# Altium PCB PCB1.PcbDoc
Units mm, origin at the board's own origin, x right, y up, seen from the top; angles counter-clockwise.
Board outline 88.9 x 93.98 mm, 2 copper layers (Top Layer, Bottom Layer); 19 components, 17 nets, 114 pads, 0 vias.
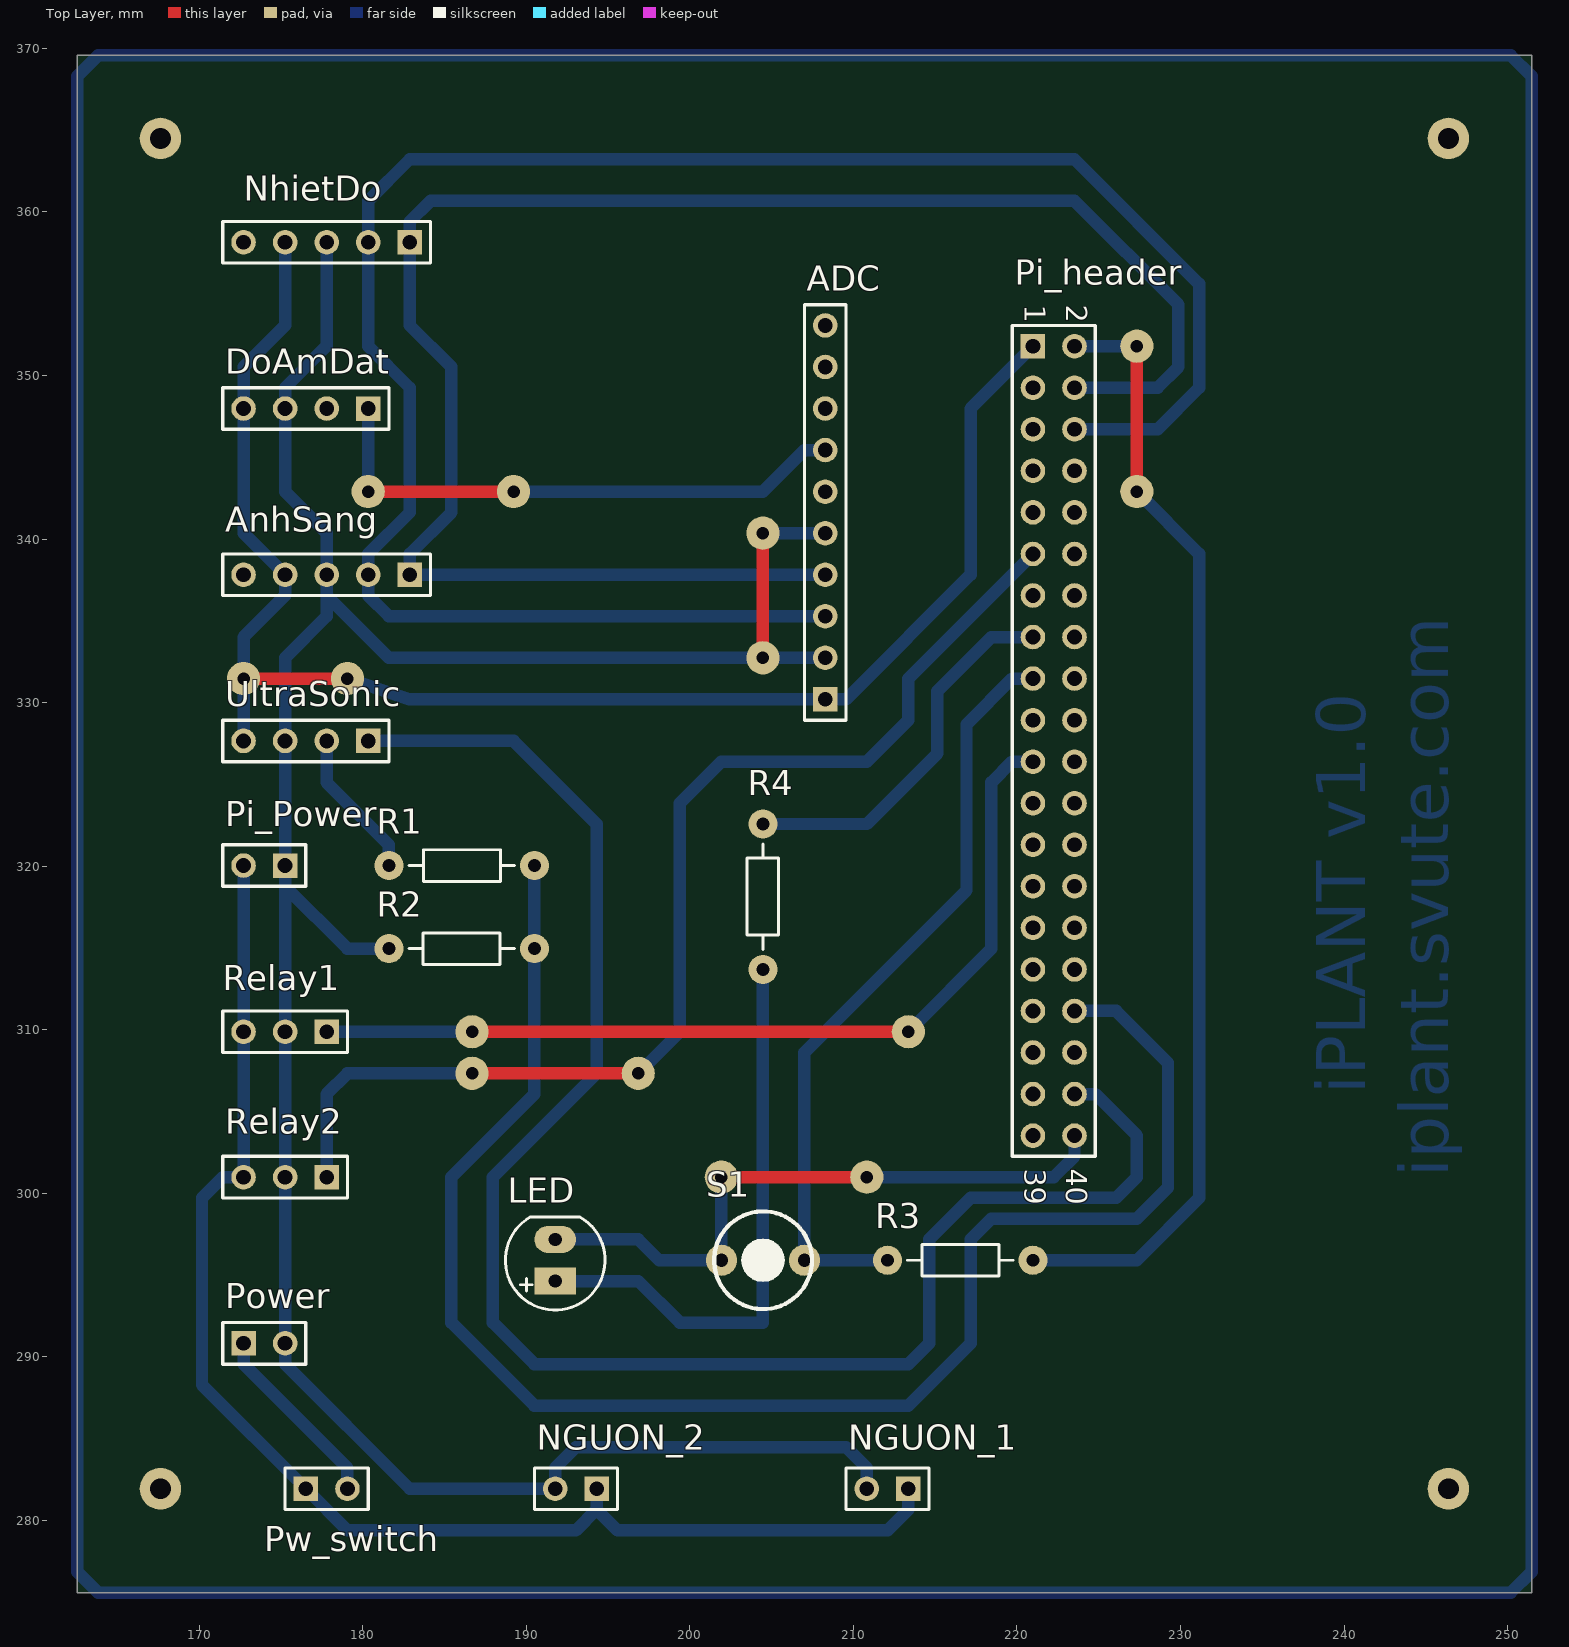
[diagram p0: Top Layer view]
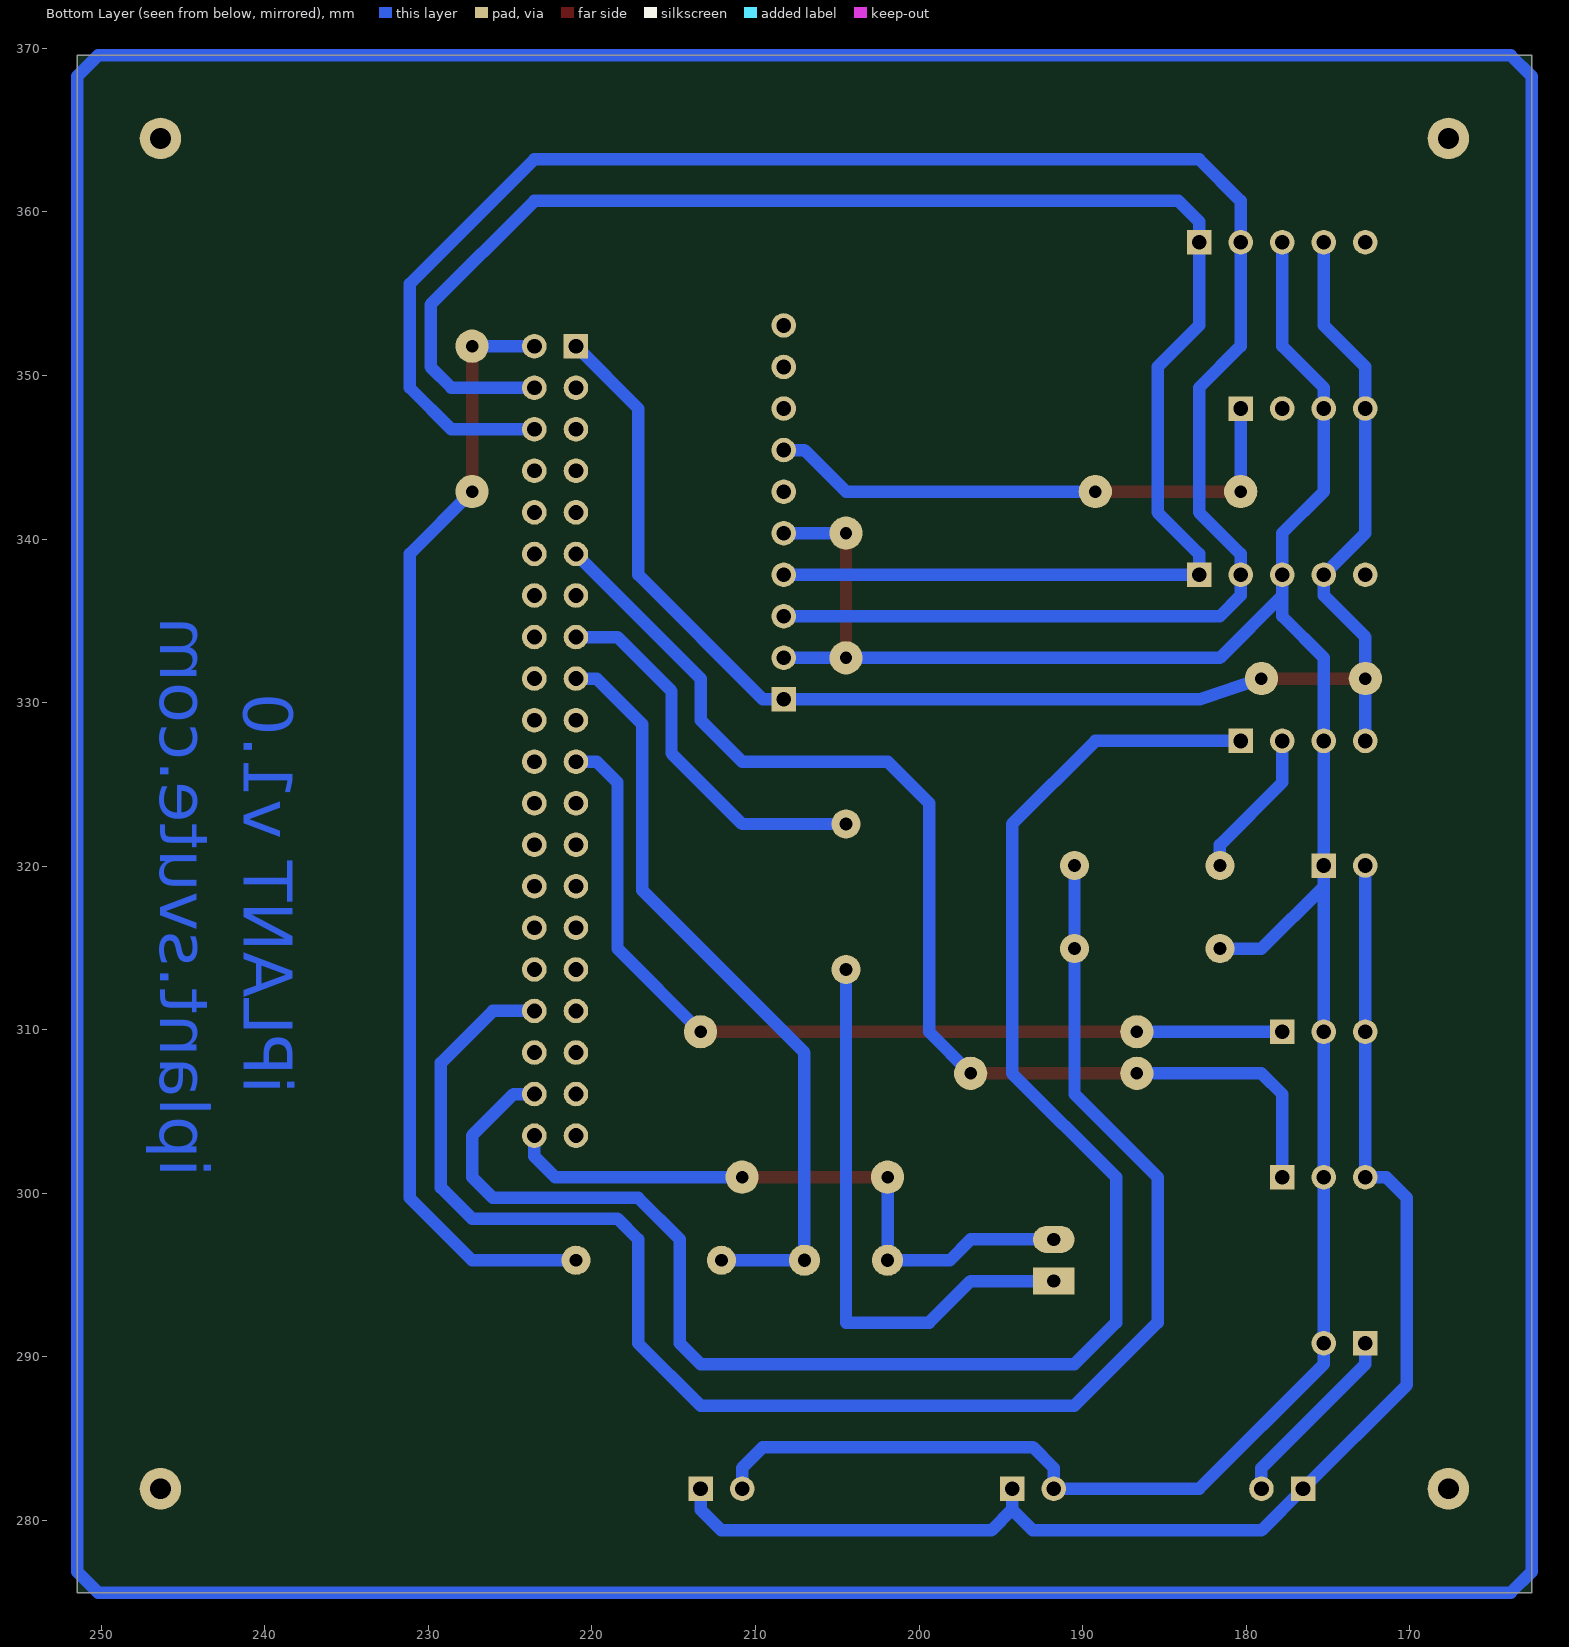
[diagram p1: Bottom Layer view, seen from below]

## Layer stack, top to bottom
Top Solder: solder mask 0.0102, Solder Resist, Dk 3.5
Top Layer: signal copper 0.0356
Dielectric 1: dielectric 0.32, FR-4, Dk 4.8
Bottom Layer: signal copper 0.0356
Bottom Solder: solder mask 0.0102, Solder Resist, Dk 3.5

## Board outline
162.56,275.59 251.46,275.59 251.46,369.57 162.56,369.57

## Design rules (kind name [scope] priority, off if disabled: settings)
Clearance [All] p1: gap=0.254
DiffPairsRouting [All] p1: maxlimit=1.016 minlimit=0.254 mostfreqgap=0.762 toplayer_minwidth=0.381 toplayer_maxwidth=1.016 toplayer_prefwidth=0.762 bottomlayer_minwidth=0.381 bottomlayer_maxwidth=1.016 bottomlayer_prefwidth=0.762 maxuncoupledlength=12.7
PolygonConnect [All] p1: connectstyle=Relief reliefconductorwidth=0.254 reliefentries=4 polygonreliefangle="90 Angle" airgapwidth=0.254
RoutingVias [All] p1: holewidth=0.711 width=1.27 viastyle="Through Hole" minholewidth=0.711 minwidth=1.27 maxholewidth=0.711 maxwidth=1.27
SolderMaskExpansion [All] p1: expansion=0.102
Width [All] p1: maxlimit=1.016 minlimit=0.254 preferedwidth=0.762
29 further rules are at their usual default settings.

## Components (designator, comment, footprint, x,y, rotation, side; value= is the part's Value field where it differs from the comment)
ADC "Header 10" HDR1X10 208.28,330.2 r90 top
AnhSang "Header 5" HDR1X5 182.88,337.82 r180 top
DoAmDat "" HDR1X4 180.34,347.98 r180 top
LED "LED" LED-5-Green 191.77,294.64 r90 top
NGUON_1 "Header 2" HDR1X2 213.36,281.94 r180 top
NGUON_2 "Header 2" HDR1X2 194.31,281.94 r180 top
NhietDo "Header 5" HDR1X5 182.88,358.14 r180 top
Pi_header "Header 20X2" HDR2X20 220.98,351.79 r270 top
Pi_Power "Header 2" HDR1X2 175.26,320.04 r180 top
Power "Header 2" HDR1X2 172.72,290.83 r0 top
Pw_switch "Header 2" HDR1X2 176.53,281.94 r0 top
R1 "Res1" R1/4W 181.61,320.04 r0 top
R2 "Res1" R1/4W 190.5,314.96 r180 top
R3 "Res1" R1/4W 212.09,295.91 r0 top
R4 "Res1" R1/4W 204.47,313.69 r90 top
Relay1 "Header 3" HDR1X3 177.8,309.88 r180 top
Relay2 "Header 3" HDR1X3 177.8,300.99 r180 top
S1 "SW" "BUTTON  ROUND.CAOVANHUONG" 204.47,295.91 r180 top
UltraSonic "" HDR1X4 180.34,327.66 r180 top

## Footprints (in the part's own frame and the unit in brackets; to place one, negate y for a bottom-side part, rotate by r counter-clockwise, add the part's x,y. Pads: shape width x height; smd on the part's side, far side on the other; paste and mask are expansions set on the pad)
"BUTTON  ROUND.CAOVANHUONG" [mm]
  round 1.905 / inner round 1.524 / far side round 1.905 hole 0.8 mask+0.205: 1(-2.54,0) 2(2.54,0)
  silkscreen extent -3,-2.99 2.98,2.99, body extent -3,-3 3,3, height 4.5
HDR1X2 [mm] "Connector; Header; 2 Position"
  rect 1.5x1.5 hole 0.9: 1(0,0)
  round 1.5 hole 0.9: 2(2.54,0)
  silkscreen extent -1.27,-1.27 3.81,1.27
HDR1X3 [mm] "Connector; Header; 3 Position"
  rect 1.5x1.5 hole 0.9: 1(0,0)
  round 1.5 hole 0.9: 2(2.54,0) 3(5.08,0)
  silkscreen extent -1.27,-1.27 6.35,1.27
HDR1X4 [mm] "Connector; Header; 4 Position"
  rect 1.5x1.5 hole 0.9: 1(0,0)
  round 1.5 hole 0.9: 2(2.54,0) 3(5.08,0) 4(7.62,0)
  silkscreen extent -1.27,-1.27 8.89,1.27
HDR1X5 [mm] "Connector; Header; 5 Position"
  rect 1.5x1.5 hole 0.9: 1(0,0)
  round 1.5 hole 0.9: 2(2.54,0) 3(5.08,0) 4(7.62,0) 5(10.16,0)
  silkscreen extent -1.27,-1.27 11.43,1.27
HDR1X10 [mm] "Connector; Header; 10 Position"
  rect 1.5x1.5 hole 0.9: 1(0,0)
  round 1.5 hole 0.9: 2(2.54,0) 3(5.08,0) 4(7.62,0) 5(10.16,0) 6(12.7,0) 7(15.24,0) 8(17.78,0) 9(20.32,0) 10(22.86,0)
  silkscreen extent -1.27,-1.27 24.13,1.27
HDR2X20 [mm] "Connector; Header; 20x2 Position"
  rect 1.5x1.5 hole 0.9: 1(0,0)
  round 1.5 hole 0.9: 2(0,2.54) 3(2.54,0) 4(2.54,2.54) 5(5.08,0) 6(5.08,2.54) 7(7.62,0) 8(7.62,2.54) 9(10.16,0) 10(10.16,2.54) 11(12.7,0) 12(12.7,2.54) 13(15.24,0) 14(15.24,2.54) 15(17.78,0) 16(17.78,2.54) 17(20.32,0) 18(20.32,2.54) 19(22.86,0) 20(22.86,2.54) 21(25.4,0) 22(25.4,2.54) 23(27.94,0) 24(27.94,2.54) 25(30.48,0) 26(30.48,2.54) 27(33.02,0) 28(33.02,2.54) 29(35.56,0) 30(35.56,2.54) 31(38.1,0) 32(38.1,2.54) 33(40.64,0) 34(40.64,2.54) 35(43.18,0) 36(43.18,2.54) 37(45.72,0) 38(45.72,2.54) 39(48.26,0) 40(48.26,2.54)
  silkscreen extent -1.27,-1.27 49.53,3.81
LED-5-Green [mil] "LED 2 PIN, 5 ly , Only colour,pin to pin 100mil"
  rect 65x100 hole 32: 1(0,0)
  oval 65x100 hole 32: 2(100,0)
  silkscreen extent -70,-120 154,120, body extent -69,-120 145,117, height 339
R1/4W [mil] "R 1/4W, 2 Pin, 350mil"
  round 70 hole 31: 1(0,0) 2(350,0)
  silkscreen extent 48,-38 302,38, body extent -40,-47 386,47, height 111

## Part data
ADC: "Header, 10-Pin"
AnhSang NhietDo: "Header, 5-Pin"
DoAmDat UltraSonic: library part "Header 4", "Header, 4-Pin"
LED: "LED Single colour Green and Red"
NGUON_1 NGUON_2 Pi_Power Power Pw_switch: "Header, 2-Pin"
Pi_header: "Header, 20-Pin, Dual row"
R1 R2 R3 R4: library part Res1_1, "Resistor"
Relay1 Relay2: "Header, 3-Pin"
S1: library part SW-Button, "Switch-Button"

## Free pads (board coordinates)
  round 2.032 hole 0.762: 0(172.72,331.47) 0(179.07,331.47) 0(180.34,342.9) 0(186.69,307.34) 0(186.69,309.88) 0(189.23,342.9) 0(196.85,307.34) 0(201.93,300.99) 0(204.47,332.74) 0(204.47,340.36) 0(210.82,300.99) 0(213.36,309.88) 0(227.33,342.9) 0(227.33,351.79)
  round 2.54 hole 1.27: 2(167.64,281.94) 2(167.64,364.49) 2(246.38,281.94) 2(246.38,364.49)

## Nets (pads, with @x,y where several pads share a name; then routed paths per layer and width w, separated by ;. In a path a pad name is that pad's centre, name@x,y a point inside that pad or via, vN(x,y) a via of type N, cw(c..) or ccw(c..) an arc to the next point about the centre after c; other vN are vias at no path point)
NetADC_1: ADC.1 AnhSang.4 DoAmDat.4 NhietDo.4 pad.0@172.72,331.47 pad.0@179.07,331.47 Pi_header.1 UltraSonic.4 | length 97
  Top Layer w0.762: pad.0@172.72,331.47 pad.0@179.07,331.47
  Bottom Layer w0.762: UltraSonic.4 172.72,331.47 172.72,334.01 175.26,336.55 AnhSang.4 172.72,340.36 DoAmDat.4 172.72,350.52 175.26,353.06 NhietDo.4 ; pad.0@179.07,331.47 182.88,330.2 ADC.1 209.55,330.2 217.17,337.82 217.17,347.98 Pi_header.1
NetADC_2: ADC.2 ADC.5 AnhSang.3 DoAmDat.3 NGUON_1.2 NGUON_2.2 NhietDo.3 pad.0@204.47,332.74 pad.0@204.47,340.36 Pi_Power.1 Power.2 R2.2 Relay1.2 Relay2.2 UltraSonic.3 | length 165.5
  Top Layer w0.762: pad.0@204.47,332.74 pad.0@204.47,340.36
  Bottom Layer w0.762: NhietDo.3 177.8,351.79 175.26,349.25 DoAmDat.3 175.26,342.9 177.8,340.36 AnhSang.3 177.8,336.55 ; R2.2 179.07,314.96 175.26,318.77 ; pad.0@204.47,340.36 ADC.5 ; ADC.2 204.47,332.74 181.61,332.74 177.8,336.55 ; NGUON_1.2 210.82,283.21 209.55,284.48 193.04,284.48 191.77,283.21 NGUON_2.2 182.88,281.94 175.26,289.56 Power.2 Relay2.2 Relay1.2 175.26,318.77 ; 175.26,318.77 Pi_Power.1 UltraSonic.3 175.26,332.74 177.8,335.28 177.8,336.55
NetADC_3: ADC.3 AnhSang.2 NhietDo.2 Pi_header.6 | length 124.7
  Bottom Layer w0.762: ADC.3 181.61,335.28 180.34,336.55 AnhSang.2 180.34,339.09 182.88,341.63 182.88,349.25 180.34,351.79 NhietDo.2 180.34,360.68 182.88,363.22 223.52,363.22 231.14,355.6 231.14,349.25 228.6,346.71 Pi_header.6
NetADC_4: ADC.4 AnhSang.1 NhietDo.1 Pi_header.4 | length 109.9
  Bottom Layer w0.762: ADC.4 AnhSang.1 182.88,339.09 185.42,341.63 185.42,350.52 182.88,353.06 NhietDo.1 182.88,359.41 184.15,360.68 223.52,360.68 229.87,354.33 229.87,350.52 228.6,349.25 Pi_header.4
NetADC_7: ADC.7 DoAmDat.1 pad.0@180.34,342.9 pad.0@189.23,342.9 | length 34.1
  Top Layer w0.762: pad.0@180.34,342.9 pad.0@189.23,342.9
  Bottom Layer w0.762: pad.0@180.34,342.9 DoAmDat.1 ; pad.0@189.23,342.9 204.47,342.9 207.01,345.44 ADC.7
NetLED_1: LED.1 R4.1 | length 35.3
  Bottom Layer w0.762: LED.1 196.85,294.64 199.39,292.1 204.47,292.1 R4.1
NetLED_2: LED.2 pad.0@201.93,300.99 pad.0@210.82,300.99 Pi_header.40 S1.2 | length 39.2
  Top Layer w0.762: pad.0@201.93,300.99 pad.0@210.82,300.99
  Bottom Layer w0.762: LED.2 196.85,297.18 198.12,295.91 S1.2 pad.0@201.93,300.99 ; pad.0@210.82,300.99 222.25,300.99 223.52,302.26 Pi_header.40
NetNGUON_1_1: NGUON_1.1 NGUON_2.1 Pi_Power.2 Pw_switch.1 Relay1.3 Relay2.3 | length 84.5
  Bottom Layer w0.762: Pi_Power.2 Relay1.3 Relay2.3 171.45,300.99 170.18,299.72 170.18,288.29 Pw_switch.1 179.07,279.4 193.04,279.4 194.31,280.67 ; NGUON_2.1 194.31,280.67 ; NGUON_1.1 213.36,280.67 212.09,279.4 195.58,279.4 194.31,280.67
NetPi_header_2: pad.0@227.33,342.9 pad.0@227.33,351.79 Pi_header.2 R3.2 | length 69.2
  Top Layer w0.762: pad.0@227.33,342.9 pad.0@227.33,351.79
  Bottom Layer w0.762: R3.2 227.33,295.91 231.14,299.72 231.14,339.09 pad.0@227.33,342.9 ; Pi_header.2 pad.0@227.33,351.79
NetPi_header_11: pad.0@186.69,307.34 pad.0@196.85,307.34 Pi_header.11 Relay2.1 | length 71.6
  Top Layer w0.762: pad.0@186.69,307.34 pad.0@196.85,307.34
  Bottom Layer w0.762: Relay2.1 177.8,306.07 179.07,307.34 pad.0@186.69,307.34 ; pad.0@196.85,307.34 199.39,309.88 199.39,323.85 201.93,326.39 210.82,326.39 213.36,328.93 213.36,331.47 Pi_header.11
NetPi_header_15: Pi_header.15 R4.2 | length 23.5
  Bottom Layer w0.762: R4.2 210.82,322.58 215.138,326.898 215.138,330.708 218.44,334.01 Pi_header.15
NetPi_header_17: Pi_header.17 R3.1 S1.1 | length 47.2
  Bottom Layer w0.762: R3.1 S1.1 207.01,308.61 216.916,318.516 216.916,328.676 219.71,331.47 Pi_header.17
NetPi_header_21: pad.0@186.69,309.88 pad.0@213.36,309.88 Pi_header.21 Relay1.1 | length 56
  Top Layer w0.762: pad.0@186.69,309.88 pad.0@213.36,309.88
  Bottom Layer w0.762: Relay1.1 pad.0@186.69,309.88 ; pad.0@213.36,309.88 218.44,314.96 218.44,325.12 219.71,326.39 Pi_header.21
NetPi_header_34: Pi_header.34 R1.2 R2.1 | length 99.9
  Bottom Layer w0.762: R1.2 R2.1 190.5,306.07 185.42,300.99 185.42,292.1 190.5,287.02 213.36,287.02 217.17,290.83 217.17,297.18 218.44,298.45 227.33,298.45 229.235,300.355 229.235,307.975 226.06,311.15 Pi_header.34
NetPi_header_38: Pi_header.38 UltraSonic.1 | length 105.5
  Bottom Layer w0.762: UltraSonic.1 189.23,327.66 194.31,322.58 194.31,307.34 187.96,300.99 187.96,292.1 190.5,289.56 213.36,289.56 214.63,290.83 214.63,297.18 217.17,299.72 226.06,299.72 227.33,300.99 227.33,303.53 224.79,306.07 Pi_header.38
NetPower_1: Power.1 Pw_switch.2 | length 11.5
  Bottom Layer w0.762: Power.1 172.72,289.56 179.07,283.21 Pw_switch.2
NetR1_1: R1.1 UltraSonic.2 | length 9.2
  Bottom Layer w0.762: UltraSonic.2 177.8,325.12 181.61,321.31 R1.1
pads on no net: ADC.6 ADC.8 ADC.9 ADC.10 AnhSang.5 DoAmDat.2 NhietDo.5 Pi_header.3 Pi_header.5 Pi_header.7 Pi_header.8 Pi_header.9 Pi_header.10 Pi_header.12 Pi_header.13 Pi_header.14 Pi_header.16 Pi_header.18 Pi_header.19 Pi_header.20 Pi_header.22 Pi_header.23 Pi_header.24 Pi_header.25 Pi_header.26 Pi_header.27 Pi_header.28 Pi_header.29 Pi_header.30 Pi_header.31 Pi_header.32 Pi_header.33 Pi_header.35 Pi_header.36 Pi_header.37 Pi_header.39
copper on no net: | length 362.8
  Bottom Layer w0.762: 162.56,276.86 162.56,367.03 162.56,368.3 163.83,369.57 250.19,369.57 251.46,368.3 251.46,367.03 251.46,276.86 250.19,275.59 163.83,275.59 162.56,276.86

## Other copper
Bottom Layer:
  text "iPLANT v1.0" at 241.3,306.07 h3 r90
  text "iplant.svute.com" at 246.38,300.99 h3 r90

## Text inside footprints (layer, text, board x,y; h text height)
Pi_header: Top Overlay "1" at 220.472,354.33 h1.27 r270; Top Overlay "2" at 223.012,354.33 h1.27 r270; Top Overlay "40" at 223.012,301.498 h1.27 r270; Top Overlay "39" at 220.472,301.498 h1.27 r270